# EAGLE board openmv (EAGLE 9.6.2)
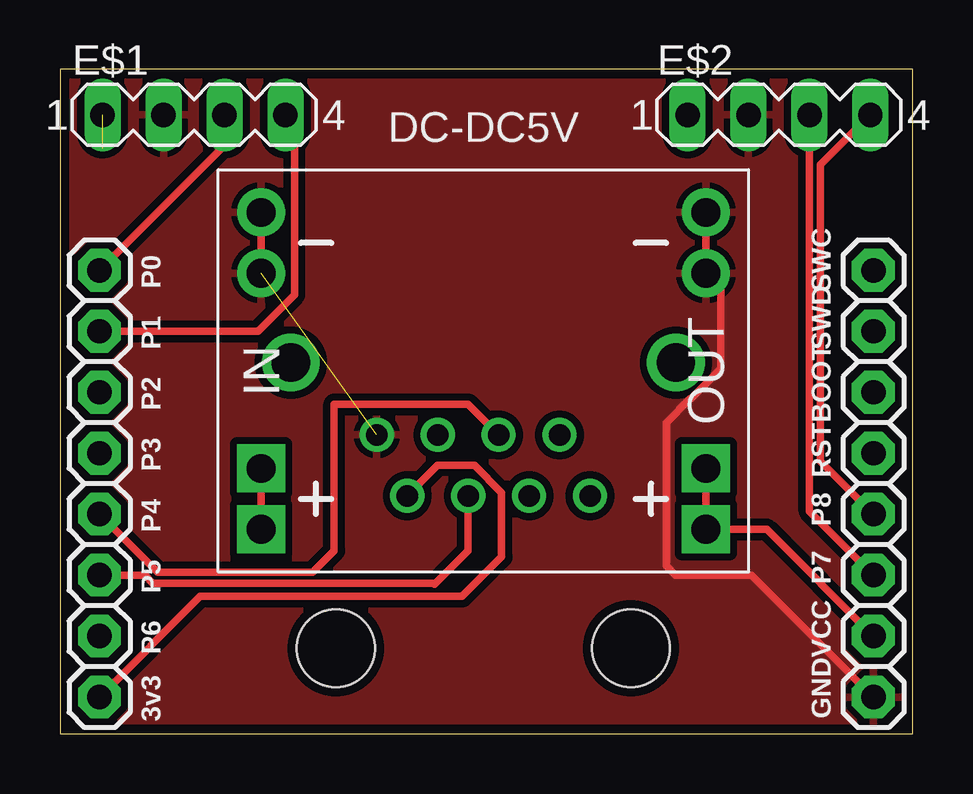
[diagram p0: board, top side]
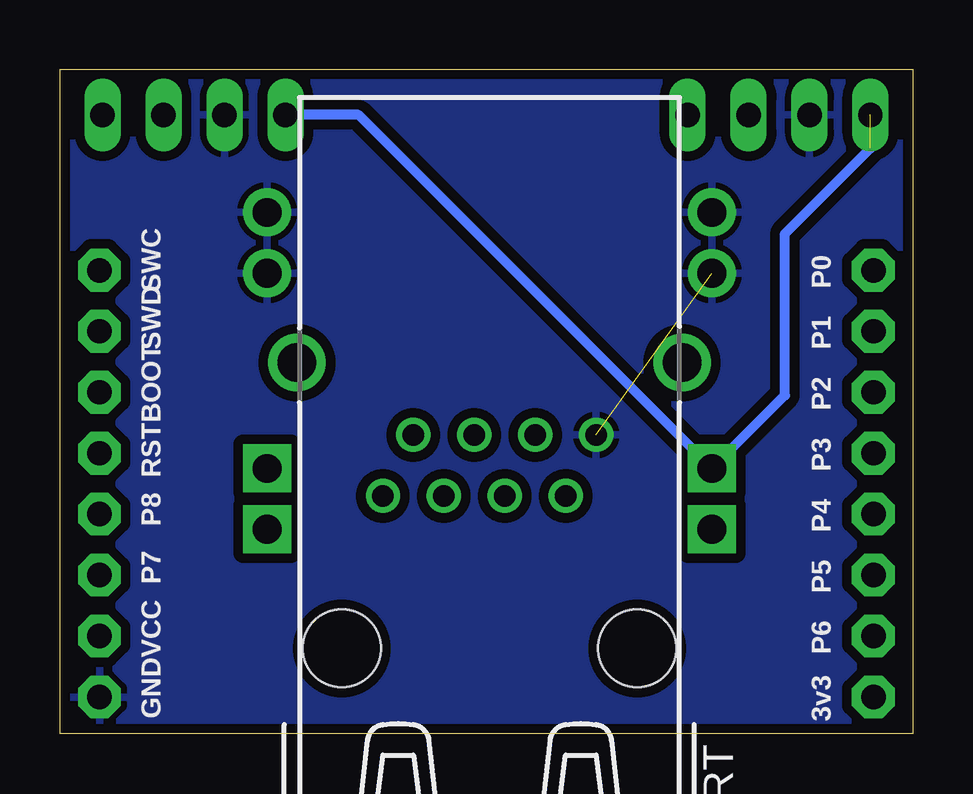
[diagram p1: board, bottom side, seen from below]

Size 35.56 x 27.69 mm. Coordinates in mm from the lower left corner, seen from the top.
Outline: 0,0 35.56,0 35.56,27.69 0,27.69 0,0
Copper layers (1*16): Top 0.0356mm / dielectric 1.5011mm / Bottom 0.0356mm
Design rules "default": minimum track width 6mil, minimum drill 13mil, track to track 6mil, track to pad 6mil, pad to pad 6mil, via to via 6mil, smd to smd 6mil, copper to edge 15mil, drill to drill 6mil, minimum pad ring 7mil, minimum via ring 7mil, stop-mask expansion 3mil, vias tented up to drill 30mil, thermal gap 10mil
Net classes: 1 vcc: width 1.016 mm, clearance 0.203 mm; 2 antenna: width 0.363 mm, clearance 0.305 mm; 3 1.8v: width 0.457 mm, clearance 0.254 mm

## Footprints (pad centres in the part's own frame; a part is rotated, then mirrored left to right if it is on the bottom)
DC-DC-STEP-DOWN-MP1584 = drill 1.2 pad 2 square: IN+.1 -9.271,-4.064; IN+.2 -9.271,-6.604; OUT+.1 9.271,-4.064; OUT+.2 9.271,-6.604 | drill 1.2 pad 2: IN-.1 -9.271,6.604; IN-.2 -9.271,4.064; OUT-.1 9.271,6.604; OUT-.2 9.271,4.064
MA04-1 = drill 1.016 long: 1 -3.81,0; 2 -1.27,0; 3 1.27,0; 4 3.81,0
OPENMV3 = drill 1.016 pad 1.778 octagon: 11 1.651,19.304; 12 1.651,16.764; 13 1.651,14.224; 14 1.651,11.684; 15 1.651,9.144; 16 1.651,6.604; 17 1.651,4.064; 18 1.651,1.524; 21 33.909,19.304; 22 33.909,16.764; 23 33.909,14.224; 24 33.909,11.684; 25 33.909,9.144; 26 33.909,6.604; 27 33.909,4.064; 28 33.909,1.524
XPORT = drill 0.9 pad 1.422: 1 1.27,-4.445; 2 -1.27,-3.175; 3 1.27,-1.905; 4 -1.27,-0.635; 5 1.27,0.635; 6 -1.27,1.905; 7 1.27,3.175; 8 -1.27,4.445 | drill 1.6 pad 2.2: SH1 4.28,8.025; SH2 4.28,-8.025 | hole 3.25: -7.62,-6.15; -7.62,6.15

## Placement (x,y rotation side)
DC-DC5V  [DC-DC-STEP-DOWN-MP1584]  17.65,15.11 0 top
E$1  [MA04-1]  5.59,25.78 0 top
E$2  [MA04-1]  29.97,25.78 0 top
U$2  OPENMV3  [OPENMV3]  0,0 0 top
XPORT  [XPORT]  17.65,11.18 90 bottom

## Library data of the parts
DC-DC5V = diy-modules
E$1 E$2 = con-lstb
U$2 = openmv
XPORT = lantronix

## Nets
3.3V: U$2.18 XPORT.2
BOOT: U$2.23
DAC: U$2.17
GND: DC-DC5V.IN-.1 DC-DC5V.IN-.2 DC-DC5V.OUT-.1 DC-DC5V.OUT-.2 E$1.2 E$2.2 U$2.28 XPORT.1
MISO: E$1.4 U$2.12
MOSI: E$1.3 U$2.11
PWM1: E$2.3 U$2.26
PWM2: E$2.4 U$2.25
RESET: U$2.24
S$2: DC-DC5V.IN+.1 DC-DC5V.IN+.2 E$1.1 E$2.1
SCL: U$2.15 XPORT.5
SCLK: U$2.13
SDA: U$2.16 XPORT.4
SSEL: U$2.14
SWC: U$2.21
SWD: U$2.22
VIN: DC-DC5V.OUT+.1 DC-DC5V.OUT+.2 U$2.27

## Tracks (layer width: path | path; a pad name or v marks a point on that pad's centre or on a via)
3.3V
  Top 0.305: XPORT.2 15.75,11.18 17.27,11.18 18.41,10.03 18.41,7.37 16.76,5.71 5.84,5.71 U$2.18
GND  (1 unrouted)
  Top 0.305: DC-DC5V.IN-.1 DC-DC5V.IN-.2 | U$2.28 28.83,6.6 25.65,6.6 25.27,6.99 25.27,12.95 26.27,13.95 26.3,13.95 27.56,15.21 27.56,18.54 DC-DC5V.OUT-.2 DC-DC5V.OUT-.1
  pour Bottom (isolate 0.406, rank 2): 0,0 35.56,0 35.56,27.69 0,27.69
  pour Top (isolate 0.305, rank 2): 0,0 35.56,0 35.56,27.69 0,27.69
MISO
  Top 0.305: U$2.12 8.26,16.76 9.78,18.29 9.78,25.4 E$1.4
MOSI
  Top 0.305: U$2.11 6.86,24.51 E$1.3
PWM1
  Top 0.305: U$2.26 31.24,9.27 E$2.3
PWM2
  Top 0.305: U$2.25 31.7,11.35 31.7,23.7 E$2.4
S$2  (1 unrouted)
  Top 0.305: DC-DC5V.IN+.2 DC-DC5V.IN+.1
  Bottom 0.406: 1.78,24.38 5.33,20.83 5.33,14.1 DC-DC5V.IN+.1 23.11,25.78 E$2.1
SCL
  Top 0.305: U$2.15 4.06,6.73 10.54,6.73 11.43,7.62 11.43,13.72 17.02,13.72 XPORT.5
SDA
  Top 0.305: U$2.16 3.54,6.6 3.88,6.27 15.57,6.27 15.62,6.22 17.02,7.62 XPORT.4
VIN
  Top 0.305: DC-DC5V.OUT+.1 DC-DC5V.OUT+.2 29.46,8.51 U$2.27

## Text on the board
tPlace: P0 | SWC | P1 | SWD | P2 | BOOT | P3 | RST | P8 | P4 | P5 | P7 | P6 | VCC | 3v3 | GND
bPlace: P0 | SWC | P1 | SWD | P2 | BOOT | P3 | RST | P8 | P4 | P5 | P7 | P6 | VCC | 3v3 | GND
bValues: IOIA/ReverbLand2021 | rev0.2